# Altium PCB PcbRuler.PcbDoc
Units mil, origin at the board's own origin, x right, y up, seen from the top; angles counter-clockwise.
Board outline 6099 x 999.5 mil, 2 copper layers (Top, Bottom); 35 components, 1 nets, 1008 pads, 0 vias.
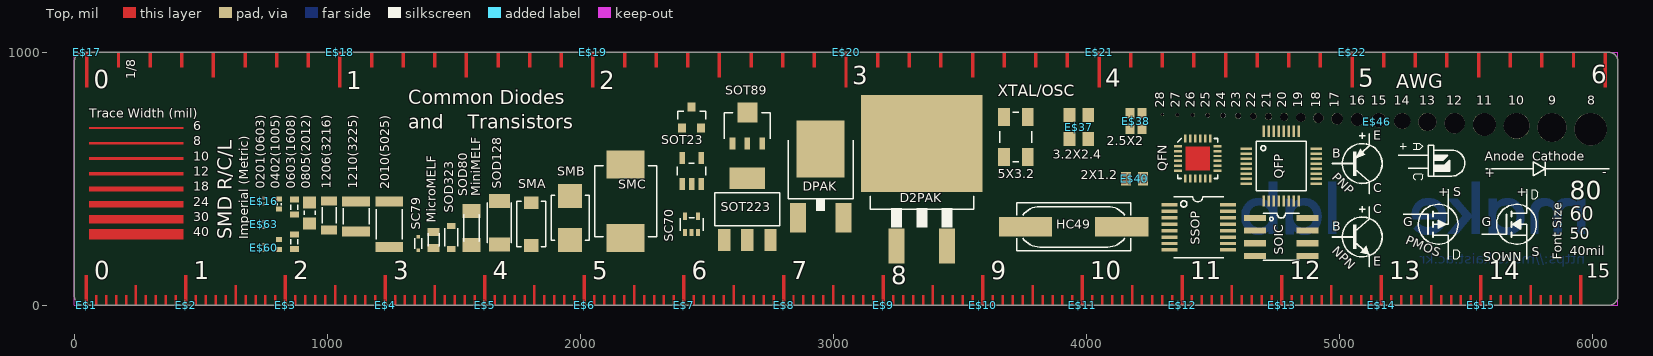
[diagram p0: Top view]
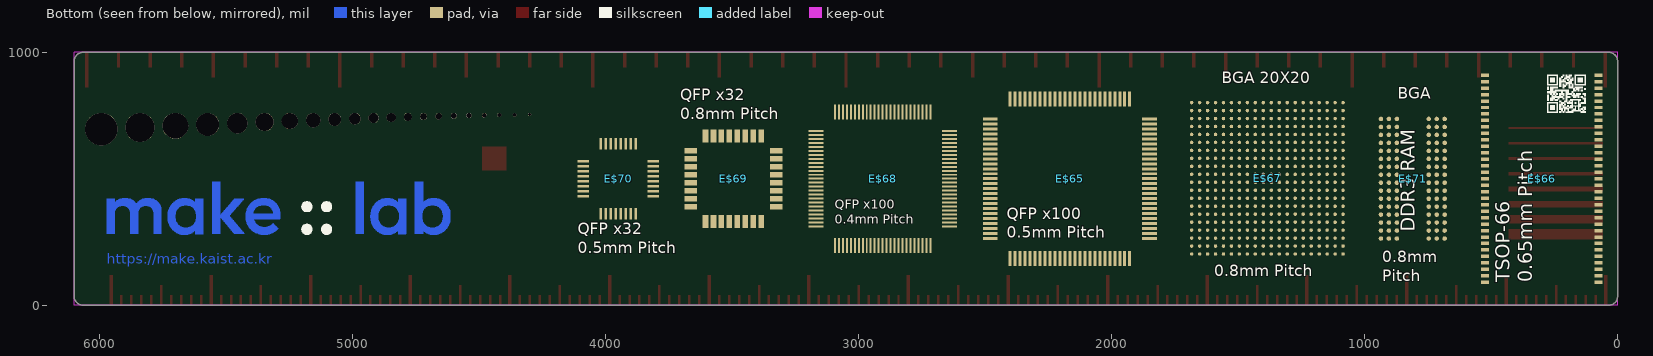
[diagram p1: Bottom view, seen from below]

## Layer stack, top to bottom
Top Solder: solder mask 0.4, Solder Resist, Dk 3.5
Top: signal copper 1.378
Dielectric 1: dielectric 12.6, FR-4, Dk 4.8
Bottom: signal copper 1.378
Bottom Solder: solder mask 0.4, Solder Resist, Dk 3.5

## Board outline
1,35 1,964.5 cw(c36,964.5) 36,999.5 6065,999.5 cw(c6065,964.5) 6100,964.5 6100,35 cw(c6065,35) 6065,0 36,0 cw(c36,35)

## Design rules (kind name [scope] priority, off if disabled: settings)
Clearance "Clearance (Same Net)" [All] p1: gap=8 ignorepadtopadclearanceinfootprint=FALSE
Clearance [All] p2: gap=8 ignorepadtopadclearanceinfootprint=FALSE except(0.1: Arc-Poly Track-Poly SMDPad-Poly THPad-Poly Via-Poly Fill-Poly Poly-Poly Poly-Region Poly-Text Poly-Hole)
HoleSize [All] p1: absolutevalues=TRUE maxlimit=100000 minlimit=15.5 maxpercent=80.000 minpercent=20.000
HoleToHoleClearance mdDrill [All] p1: gap=8 allowstackedmicrovias=TRUE
PasteMaskExpansion Expansion_SMDPaste_OFF [InPadClass('SMDPaste_OFF')] p1: expansion=0
PasteMaskExpansion mlMinCreamFrame [All] p2: expansion=0
PolygonConnect ThermalVias [IsVia] p1: connectstyle=Direct reliefconductorwidth=10 reliefentries=4 polygonreliefangle="90 Angle" airgapwidth=10
PolygonConnect [All] p2: connectstyle=Direct reliefconductorwidth=10 reliefentries=4 polygonreliefangle="90 Angle" airgapwidth=10
RoutingVias [All] p1: holewidth=15.5 width=31.5 viastyle="Through Hole" minholewidth=15.5 minwidth=31.5 maxholewidth=100 maxwidth=100
SolderMaskExpansion mlMinStopFrame [All] p1: expansion=4 istentingtop=FALSE
Width [All] p1: maxlimit=10000 minlimit=8 preferedwidth=8
27 further rules are at their usual default settings.

## Components (designator, comment, footprint, x,y, rotation, side; value= is the part's Value field where it differs from the comment)
E$1 "" EDGE-MILLIMETERS 47.24,0 r0 top
E$2 "" EDGE-MILLIMETERS 440.94,0 r0 top
E$3 "" EDGE-MILLIMETERS 834.65,0 r0 top
E$4 "" EDGE-MILLIMETERS 1228.35,0 r0 top
E$5 "" EDGE-MILLIMETERS 1622.05,0 r0 top
E$6 "" EDGE-MILLIMETERS 2015.75,0 r0 top
E$7 "" EDGE-MILLIMETERS 2409.45,0 r0 top
E$8 "" EDGE-MILLIMETERS 2803.15,0 r0 top
E$9 "" EDGE-MILLIMETERS 3196.85,0 r0 top
E$10 "" EDGE-MILLIMETERS 3590.55,0 r0 top
E$11 "" EDGE-MILLIMETERS 3984.25,0 r0 top
E$12 "" EDGE-MILLIMETERS 4377.95,0 r0 top
E$13 "" EDGE-MILLIMETERS 4771.65,0 r0 top
E$14 "" EDGE-MILLIMETERS 5165.35,0 r0 top
E$15 "" EDGE-MILLIMETERS 5559.06,0 r0 top
E$16 "" 0201 750,412 r90 top
E$17 "" EDGE-INCHES-EIGTH 50,1000 r0 top
E$18 "" EDGE-INCHES-EIGTH 1050,1000 r0 top
E$19 "" EDGE-INCHES-EIGTH 2050,1000 r0 top
E$20 "" EDGE-INCHES-EIGTH 3050,1000 r0 top
E$21 "" EDGE-INCHES-EIGTH 4050,1000 r0 top
E$22 "" EDGE-INCHES-EIGTH 5050,1000 r0 top
E$37 "" CRYSTAL-SMD-3.2X2.5 3970,704 r90 top
E$38 "" CRYSTAL-SMD-2.5X2 4196,728 r90 top
E$40 "" XTAL-2X1.2 4190,500 r0 top
E$46 "" ALL-HOLES 4300,760 r0 top
E$60 "" 0201 750,228 r90 top
E$63 "" 0201 750,320 r90 top
E$65 "" TQFP100 2165,500 r180 bottom
E$66 "" TSOP-66 300,500 r90 bottom
E$67 "" BGA-0.8MM-P-19X19 1385,501.77 r180 bottom
E$68 "" TQFP-100-12X12MM 2905,500 r180 bottom
E$69 "" TQFP32-08 3495,500 r180 bottom
E$70 "" TQFP32-5MM 3950,500 r180 bottom
E$71 "" BGA-96-14X8MM 810,500 r180 bottom

## Footprints (in the part's own frame and the unit in brackets; to place one, negate y for a bottom-side part, rotate by r counter-clockwise, add the part's x,y. Pads: shape width x height; smd on the part's side, far side on the other; paste and mask are expansions set on the pad)
0201 [mil] "0201"
  rect 11.81x11.81 smd: P$1(-11.81,0) P$2(11.81,0)
ALL-HOLES [mil] "ALL-HOLES"
  round 128.35 hole 128.35 unplated: MH1(1693.05,-64.17)
  round 114.57 hole 114.57 unplated: MH2(1540.1,-57.28)
  round 101.97 hole 101.97 unplated: MH3(1400.33,-50.98)
  round 90.55 hole 90.55 unplated: MH4(1272.58,-45.28)
  round 80.71 hole 80.71 unplated: MH5(1155.45,-40.35)
  round 72.05 hole 72.05 unplated: MH6(1047.58,-36.02)
  round 64.17 hole 64.17 unplated: MH7(947.97,-32.09)
  round 57.09 hole 57.09 unplated: MH8(855.85,-28.54)
  round 50.79 hole 50.79 unplated: MH9(770.41,-25.39)
  round 45.28 hole 45.28 unplated: MH10(690.89,-22.64)
  round 40.16 hole 40.16 unplated: MH11(616.67,-20.08)
  round 35.91 hole 35.91 unplated: MH12(547.15,-17.95)
  round 31.97 hole 31.97 unplated: MH13(481.71,-15.98)
  round 28.46 hole 28.46 unplated: MH14(420,-14.23)
  round 25.35 hole 25.35 unplated: MH15(360,-12.68)
  round 22.56 hole 22.56 unplated: MH16(300,-11.28)
  round 20.12 hole 20.12 unplated: MH17(240,-10.06)
  round 17.91 hole 17.91 unplated: MH18(180,-8.96)
  round 15.94 hole 15.94 unplated: MH19(120,-7.97)
  round 14.21 hole 14.21 unplated: MH20(60,-7.11)
  round 12.64 hole 12.64 unplated: MH21(0,-6.32)
BGA-0.8MM-P-19X19 [mm] "BGA-0.8MM-P-19X19"
  rrect100% 0.35x0.35 smd: P$1(-4.4,-4.4) P$2(-4.4,-3.6) P$3(-3.6,-3.6) P$4(-3.6,-4.4) P$5(-2.8,-4.4) P$6(-2.8,-3.6) P$7(-4.4,-2.8) P$8(-3.6,-2.8) P$9(-2.8,-2.8) P$10(-4.4,-2) P$11(-3.6,-2) P$12(-2.8,-2) P$13(-2,-2) P$14(-2,-2.8) P$15(-2,-3.6) P$16(-2,-4.4) P$17(-4.4,-1.2) P$18(-3.6,-1.2) P$19(-2.8,-1.2) P$20(-2,-1.2) P$21(-1.2,-1.2) P$22(-1.2,-2) P$23(-1.2,-2.8) P$24(-1.2,-3.6) P$25(-1.2,-4.4) P$26(-3.6,-7.6) P$27(-2.8,-7.6) P$28(-3.6,-6.8) P$29(-2.8,-6.8) P$30(-3.6,-6) P$31(-2.8,-6) P$32(-2,-6) P$33(-2,-6.8) P$34(-2,-7.6) P$35(-3.6,-5.2) P$36(-2.8,-5.2) P$37(-2,-5.2) P$38(-1.2,-5.2) P$39(-1.2,-6) P$40(-1.2,-6.8) P$41(-1.2,-7.6) P$42(-7.6,-3.6) P$43(-6.8,-3.6) P$44(-7.6,-2.8) P$45(-6.8,-2.8) P$46(-7.6,-2) P$47(-6.8,-2) P$48(-6,-2) P$49(-6,-2.8) P$50(-6,-3.6) P$51(-7.6,-1.2) P$52(-6.8,-1.2) P$53(-6,-1.2) P$54(-5.2,-1.2) P$55(-5.2,-2) P$56(-5.2,-2.8) P$57(-5.2,-3.6) P$58(-7.6,-7.6) P$59(-6.8,-7.6) P$60(-7.6,-6.8) P$61(-6.8,-6.8) P$62(-7.6,-6) P$63(-6.8,-6) P$64(-6,-6) P$65(-6,-6.8) P$66(-6,-7.6) P$67(-7.6,-5.2) P$68(-6.8,-5.2) P$69(-6,-5.2) P$70(-5.2,-5.2) P$71(-5.2,-6) P$72(-5.2,-6.8) P$73(-5.2,-7.6) P$74(-7.6,-4.4) P$75(-6.8,-4.4) P$76(-6,-4.4) P$77(-5.2,-4.4) P$78(-4.4,-5.2) P$79(-4.4,-6) P$80(-4.4,-6.8) P$81(-4.4,-7.6) P$82(2.8,-4.4) P$83(2.8,-3.6) P$84(3.6,-3.6) P$85(3.6,-4.4) P$86(4.4,-4.4) P$87(4.4,-3.6) P$88(2.8,-2.8) P$89(3.6,-2.8) P$90(4.4,-2.8) P$91(2.8,-2) P$92(3.6,-2) P$93(4.4,-2) P$94(5.2,-2) P$95(5.2,-2.8) P$96(5.2,-3.6) P$97(5.2,-4.4) P$98(2.8,-1.2) P$99(3.6,-1.2) P$100(4.4,-1.2) P$101(5.2,-1.2) P$102(6,-1.2) P$103(6,-2) P$104(6,-2.8) P$105(6,-3.6) P$106(6,-4.4) P$107(3.6,-7.6) P$108(4.4,-7.6) P$109(3.6,-6.8) P$110(4.4,-6.8) P$111(3.6,-6) P$112(4.4,-6) P$113(5.2,-6) P$114(5.2,-6.8) P$115(5.2,-7.6) P$116(3.6,-5.2) P$117(4.4,-5.2) P$118(5.2,-5.2) P$119(6,-5.2) P$120(6,-6) P$121(6,-6.8) P$122(6,-7.6) P$123(-0.4,-3.6) P$124(0.4,-3.6) P$125(-0.4,-2.8) P$126(0.4,-2.8) P$127(-0.4,-2) P$128(0.4,-2) P$129(1.2,-2) P$130(1.2,-2.8) P$131(1.2,-3.6) P$132(-0.4,-1.2) P$133(0.4,-1.2) P$134(1.2,-1.2) P$135(2,-1.2) P$136(2,-2) P$137(2,-2.8) P$138(2,-3.6) P$139(-0.4,-7.6) P$140(0.4,-7.6) P$141(-0.4,-6.8) P$142(0.4,-6.8) P$143(-0.4,-6) P$144(0.4,-6) P$145(1.2,-6) P$146(1.2,-6.8) P$147(1.2,-7.6) P$148(-0.4,-5.2) P$149(0.4,-5.2) P$150(1.2,-5.2) P$151(2,-5.2) P$152(2,-6) P$153(2,-6.8) P$154(2,-7.6) P$155(-0.4,-4.4) P$156(0.4,-4.4) P$157(1.2,-4.4) P$158(2,-4.4) P$159(2.8,-5.2) P$160(2.8,-6) P$161(2.8,-6.8) P$162(2.8,-7.6) P$163(-4.4,2.8) P$164(-4.4,3.6) P$165(-3.6,3.6) P$166(-3.6,2.8) P$167(-2.8,2.8) P$168(-2.8,3.6) P$169(-4.4,4.4) P$170(-3.6,4.4) P$171(-2.8,4.4) P$172(-4.4,5.2) P$173(-3.6,5.2) P$174(-2.8,5.2) P$175(-2,5.2) P$176(-2,4.4) P$177(-2,3.6) P$178(-2,2.8) P$179(-4.4,6) P$180(-3.6,6) P$181(-2.8,6) P$182(-2,6) P$183(-1.2,6) P$184(-1.2,5.2) P$185(-1.2,4.4) P$186(-1.2,3.6) P$187(-1.2,2.8) P$188(-3.6,-0.4) P$189(-2.8,-0.4) P$190(-3.6,0.4) P$191(-2.8,0.4) P$192(-3.6,1.2) P$193(-2.8,1.2) P$194(-2,1.2) P$195(-2,0.4) P$196(-2,-0.4) P$197(-3.6,2) P$198(-2.8,2) P$199(-2,2) P$200(-1.2,2) P$201(-1.2,1.2) P$202(-1.2,0.4) P$203(-1.2,-0.4) P$204(-7.6,3.6) P$205(-6.8,3.6) P$206(-7.6,4.4) P$207(-6.8,4.4) P$208(-7.6,5.2) P$209(-6.8,5.2) P$210(-6,5.2) P$211(-6,4.4) P$212(-6,3.6) P$213(-7.6,6) P$214(-6.8,6) P$215(-6,6) P$216(-5.2,6) P$217(-5.2,5.2) P$218(-5.2,4.4) P$219(-5.2,3.6) P$220(-7.6,-0.4) P$221(-6.8,-0.4) P$222(-7.6,0.4) P$223(-6.8,0.4) P$224(-7.6,1.2) P$225(-6.8,1.2) P$226(-6,1.2) P$227(-6,0.4) P$228(-6,-0.4) P$229(-7.6,2) P$230(-6.8,2) P$231(-6,2) P$232(-5.2,2) P$233(-5.2,1.2) P$234(-5.2,0.4) P$235(-5.2,-0.4) P$236(-7.6,2.8) P$237(-6.8,2.8) P$238(-6,2.8) P$239(-5.2,2.8) P$240(-4.4,2) P$241(-4.4,1.2) P$242(-4.4,0.4) P$243(-4.4,-0.4) P$244(2.8,2.8) P$245(2.8,3.6) P$246(3.6,3.6) P$247(3.6,2.8) P$248(4.4,2.8) P$249(4.4,3.6) P$250(2.8,4.4) P$251(3.6,4.4) P$252(4.4,4.4) P$253(2.8,5.2) P$254(3.6,5.2) P$255(4.4,5.2) P$256(5.2,5.2) P$257(5.2,4.4) P$258(5.2,3.6) P$259(5.2,2.8) P$260(2.8,6) P$261(3.6,6) P$262(4.4,6) P$263(5.2,6) P$264(6,6) P$265(6,5.2) P$266(6,4.4) P$267(6,3.6) P$268(6,2.8) P$269(3.6,-0.4) P$270(4.4,-0.4) P$271(3.6,0.4) P$272(4.4,0.4) P$273(3.6,1.2) P$274(4.4,1.2) P$275(5.2,1.2) P$276(5.2,0.4) P$277(5.2,-0.4) P$278(3.6,2) P$279(4.4,2) P$280(5.2,2) P$281(6,2) P$282(6,1.2) P$283(6,0.4) P$284(6,-0.4) P$285(-0.4,3.6) P$286(0.4,3.6) P$287(-0.4,4.4) P$288(0.4,4.4) P$289(-0.4,5.2) P$290(0.4,5.2) P$291(1.2,5.2) P$292(1.2,4.4) P$293(1.2,3.6) P$294(-0.4,6) P$295(0.4,6) P$296(1.2,6) P$297(2,6) P$298(2,5.2) P$299(2,4.4) P$300(2,3.6) P$301(-0.4,-0.4) P$302(0.4,-0.4) P$303(-0.4,0.4) P$304(0.4,0.4) P$305(-0.4,1.2) P$306(0.4,1.2) P$307(1.2,1.2) P$308(1.2,0.4) P$309(1.2,-0.4) P$310(-0.4,2) P$311(0.4,2) P$312(1.2,2) P$313(2,2) P$314(2,1.2) P$315(2,0.4) P$316(2,-0.4) P$317(-0.4,2.8) P$318(0.4,2.8) P$319(1.2,2.8) P$320(2,2.8) P$321(2.8,2) P$322(2.8,1.2) P$323(2.8,0.4) P$324(2.8,-0.4) P$325(-4.4,6.8) P$326(-3.6,6.8) P$327(-2.8,6.8) P$328(-4.4,7.6) P$329(-3.6,7.6) P$330(-2.8,7.6) P$331(-2,7.6) P$332(-2,6.8) P$338(-1.2,7.6) P$339(-1.2,6.8) P$340(-7.6,6.8) P$341(-6.8,6.8) P$342(-7.6,7.6) P$343(-6.8,7.6) P$344(-6,7.6) P$345(-6,6.8) P$350(-5.2,7.6) P$351(-5.2,6.8) P$352(2.8,6.8) P$353(3.6,6.8) P$354(4.4,6.8) P$355(2.8,7.6) P$356(3.6,7.6) P$357(4.4,7.6) P$358(5.2,7.6) P$359(5.2,6.8) P$365(6,7.6) P$366(6,6.8) P$367(-0.4,6.8) P$368(0.4,6.8) P$369(-0.4,7.6) P$370(0.4,7.6) P$371(1.2,7.6) P$372(1.2,6.8) P$377(2,7.6) P$378(2,6.8) P$379(6.8,-4.4) P$380(6.8,-3.6) P$381(6.8,-2.8) P$382(6.8,-2) P$383(7.6,-2) P$384(7.6,-2.8) P$385(7.6,-3.6) P$386(7.6,-4.4) P$387(6.8,-1.2) P$388(7.6,-1.2) P$394(6.8,-7.6) P$395(6.8,-6.8) P$396(6.8,-6) P$397(7.6,-6) P$398(7.6,-6.8) P$399(7.6,-7.6) P$400(6.8,-5.2) P$401(7.6,-5.2) P$406(6.8,2.8) P$407(6.8,3.6) P$408(6.8,4.4) P$409(6.8,5.2) P$410(7.6,5.2) P$411(7.6,4.4) P$412(7.6,3.6) P$413(7.6,2.8) P$414(6.8,6) P$415(7.6,6) P$421(6.8,-0.4) P$422(6.8,0.4) P$423(6.8,1.2) P$424(7.6,1.2) P$425(7.6,0.4) P$426(7.6,-0.4) P$427(6.8,2) P$428(7.6,2) P$433(6.8,6.8) P$434(6.8,7.6) P$435(7.6,7.6) P$436(7.6,6.8)
BGA-96-14X8MM [mm] "BGA-96-14X8MM"
  rrect100% 0.45x0.45 smd: P$1(1.6,6) P$2(2.4,6) P$3(3.2,6) P$4(1.6,5.2) P$5(2.4,5.2) P$6(3.2,5.2) P$7(1.6,4.4) P$8(2.4,4.4) P$9(3.2,4.4) P$10(1.6,3.6) P$11(2.4,3.6) P$12(3.2,3.6) P$13(1.6,2.8) P$14(2.4,2.8) P$15(3.2,2.8) P$16(1.6,2) P$17(2.4,2) P$18(3.2,2) P$19(1.6,1.2) P$20(2.4,1.2) P$21(3.2,1.2) P$22(1.6,0.4) P$23(2.4,0.4) P$24(3.2,0.4) P$25(1.6,-0.4) P$26(2.4,-0.4) P$27(3.2,-0.4) P$28(1.6,-1.2) P$29(2.4,-1.2) P$30(3.2,-1.2) P$31(1.6,-2) P$32(2.4,-2) P$33(3.2,-2) P$34(1.6,-2.8) P$35(2.4,-2.8) P$36(3.2,-2.8) P$37(1.6,-3.6) P$38(2.4,-3.6) P$39(3.2,-3.6) P$40(1.6,-4.4) P$41(2.4,-4.4) P$42(3.2,-4.4) P$43(1.6,-5.2) P$44(2.4,-5.2) P$45(3.2,-5.2) P$46(1.6,-6) P$47(2.4,-6) P$48(3.2,-6) P$49(-3.2,6) P$50(-2.4,6) P$51(-1.6,6) P$52(-3.2,5.2) P$53(-2.4,5.2) P$54(-1.6,5.2) P$55(-3.2,4.4) P$56(-2.4,4.4) P$57(-1.6,4.4) P$58(-3.2,3.6) P$59(-2.4,3.6) P$60(-1.6,3.6) P$61(-3.2,2.8) P$62(-2.4,2.8) P$63(-1.6,2.8) P$64(-3.2,2) P$65(-2.4,2) P$66(-1.6,2) P$67(-3.2,1.2) P$68(-2.4,1.2) P$69(-1.6,1.2) P$70(-3.2,0.4) P$71(-2.4,0.4) P$72(-1.6,0.4) P$73(-3.2,-0.4) P$74(-2.4,-0.4) P$75(-1.6,-0.4) P$76(-3.2,-1.2) P$77(-2.4,-1.2) P$78(-1.6,-1.2) P$79(-3.2,-2) P$80(-2.4,-2) P$81(-1.6,-2) P$82(-3.2,-2.8) P$83(-2.4,-2.8) P$84(-1.6,-2.8) P$85(-3.2,-3.6) P$86(-2.4,-3.6) P$87(-1.6,-3.6) P$88(-3.2,-4.4) P$89(-2.4,-4.4) P$90(-1.6,-4.4) P$91(-3.2,-5.2) P$92(-2.4,-5.2) P$93(-1.6,-5.2) P$94(-3.2,-6) P$95(-2.4,-6) P$96(-1.6,-6)
CRYSTAL-SMD-2.5X2 [mm] "CRYSTAL-SMD-2.5X2"
  rect 1.05x0.9 smd: 1(-0.795,-0.6) 2(0.795,-0.6) 3(0.795,0.6) 4(-0.795,0.6)
CRYSTAL-SMD-3.2X2.5 [mil] "CRYSTAL-SMD-3.2X2.5"
  rect 55.12x47.24 smd: 1(-47.24,-37.4) 2(47.24,-37.4) 3(47.24,37.4) 4(-47.24,37.4)
EDGE-INCHES-EIGTH [mil] "EDGE-INCHES-EIGTH"
  Top region: -5.91,-137.8 -5.91,0 5.91,0 5.91,-137.8
  Top region: 119.09,-59.06 119.09,0 130.91,0 130.91,-59.06
  Top region: 244.09,-59.06 244.09,0 255.91,0 255.91,-59.06
  Top region: 369.09,-59.06 369.09,0 380.91,0 380.91,-59.06
  Top region: 494.09,-98.43 494.09,0 505.91,0 505.91,-98.43
  Top region: 619.09,-59.06 619.09,0 630.91,0 630.91,-59.06
  Top region: 744.09,-59.06 744.09,0 755.91,0 755.91,-59.06
  Top region: 869.09,-59.06 869.09,0 880.91,0 880.91,-59.06
  Top region: 994.09,-137.8 994.09,0 1005.91,0 1005.91,-137.8
EDGE-MILLIMETERS [mil] "EDGE-MILLIMETERS"
  Top region: -5.91,0 -5.91,118.11 5.91,118.11 5.91,0
  Top region: 35.43,0 35.43,39.37 43.31,39.37 43.31,0
  Top region: 74.8,0 74.8,39.37 82.68,39.37 82.68,0
  Top region: 114.17,0 114.17,39.37 122.05,39.37 122.05,0
  Top region: 192.91,0 192.91,78.74 200.79,78.74 200.79,0
  Top region: 153.54,0 153.54,39.37 161.42,39.37 161.42,0
  Top region: 232.28,0 232.28,39.37 240.16,39.37 240.16,0
  Top region: 271.65,0 271.65,39.37 279.53,39.37 279.53,0
  Top region: 311.02,0 311.02,39.37 318.9,39.37 318.9,0
  Top region: 350.39,0 350.39,39.37 358.27,39.37 358.27,0
  Top region: 387.8,0 387.8,118.11 399.61,118.11 399.61,0
TQFP32-5MM [mil] "TQFP32-5MM"
  rect 45x10 smd: 1(-137.8,68.9) 2(-137.8,49.21) 3(-137.8,29.53) 4(-137.8,9.84) 5(-137.8,-9.84) 6(-137.8,-29.53) 7(-137.8,-49.21) 8(-137.8,-68.9) 17(137.8,-68.9) 18(137.8,-49.21) 19(137.8,-29.53) 20(137.8,-9.84) 21(137.8,9.84) 22(137.8,29.53) 23(137.8,49.21) 24(137.8,68.9)
  rect 10x45 smd: 9(-68.9,-137.8) 10(-49.21,-137.8) 11(-29.53,-137.8) 12(-9.84,-137.8) 13(9.84,-137.8) 14(29.53,-137.8) 15(49.21,-137.8) 16(68.9,-137.8) 25(68.9,137.8) 26(49.21,137.8) 27(29.53,137.8) 28(9.84,137.8) 29(-9.84,137.8) 30(-29.53,137.8) 31(-49.21,137.8) 32(-68.9,137.8)
TQFP32-08 [mil] "TQFP32-08"
  rect 50x22 smd: 1(-169,110.24) 2(-169,78.74) 3(-169,47.24) 4(-169,15.75) 5(-169,-15.75) 6(-169,-47.24) 7(-169,-78.74) 8(-169,-110.24) 17(169,-110.24) 18(169,-78.74) 19(169,-47.24) 20(169,-15.75) 21(169,15.75) 22(169,47.24) 23(169,78.74) 24(169,110.24)
  rect 22x50 smd: 9(-110.24,-169) 10(-78.74,-169) 11(-47.24,-169) 12(-15.75,-169) 13(15.75,-169) 14(47.24,-169) 15(78.74,-169) 16(110.24,-169) 25(110.24,169) 26(78.74,169) 27(47.24,169) 28(15.75,169) 29(-15.75,169) 30(-47.24,169) 31(-78.74,169) 32(-110.24,169)
TQFP100 [mm] "TQFP100"
  rect 1.5x0.3 smd: 1(-8,6) 2(-8,5.5) 3(-8,5) 4(-8,4.5) 5(-8,4) 6(-8,3.5) 7(-8,3) 8(-8,2.5) 9(-8,2) 10(-8,1.5) 11(-8,1) 12(-8,0.5) 13(-8,0) 14(-8,-0.5) 15(-8,-1) 16(-8,-1.5) 17(-8,-2) 18(-8,-2.5) 19(-8,-3) 20(-8,-3.5) 21(-8,-4) 22(-8,-4.5) 23(-8,-5) 24(-8,-5.5) 25(-8,-6) 51(8,-6) 52(8,-5.5) 53(8,-5) 54(8,-4.5) 55(8,-4) 56(8,-3.5) 57(8,-3) 58(8,-2.5) 59(8,-2) 60(8,-1.5) 61(8,-1) 62(8,-0.5) 63(8,0) 64(8,0.5) 65(8,1) 66(8,1.5) 67(8,2) 68(8,2.5) 69(8,3) 70(8,3.5) 71(8,4) 72(8,4.5) 73(8,5) 74(8,5.5) 75(8,6)
  rect 0.3x1.5 smd: 26(-6,-8) 27(-5.5,-8) 28(-5,-8) 29(-4.5,-8) 30(-4,-8) 31(-3.5,-8) 32(-3,-8) 33(-2.5,-8) 34(-2,-8) 35(-1.5,-8) 36(-1,-8) 37(-0.5,-8) 38(0,-8) 39(0.5,-8) 40(1,-8) 41(1.5,-8) 42(2,-8) 43(2.5,-8) 44(3,-8) 45(3.5,-8) 46(4,-8) 47(4.5,-8) 48(5,-8) 49(5.5,-8) 50(6,-8) 76(6,8) 77(5.5,8) 78(5,8) 79(4.5,8) 80(4,8) 81(3.5,8) 82(3,8) 83(2.5,8) 84(2,8) 85(1.5,8) 86(1,8) 87(0.5,8) 88(0,8) 89(-0.5,8) 90(-1,8) 91(-1.5,8) 92(-2,8) 93(-2.5,8) 94(-3,8) 95(-3.5,8) 96(-4,8) 97(-4.5,8) 98(-5,8) 99(-5.5,8) 100(-6,8)
TQFP-100-12X12MM [mm] "TQFP-100-12X12MM"
  rect 1.5x0.2 smd: 1(-6.7,4.8) 2(-6.7,4.4) 3(-6.7,4) 4(-6.7,3.6) 5(-6.7,3.2) 6(-6.7,2.8) 7(-6.7,2.4) 8(-6.7,2) 9(-6.7,1.6) 10(-6.7,1.2) 11(-6.7,0.8) 12(-6.7,0.4) 13(-6.7,0) 14(-6.7,-0.4) 15(-6.7,-0.8) 16(-6.7,-1.2) 17(-6.7,-1.6) 18(-6.7,-2) 19(-6.7,-2.4) 20(-6.7,-2.8) 21(-6.7,-3.2) 22(-6.7,-3.6) 23(-6.7,-4) 24(-6.7,-4.4) 25(-6.7,-4.8) 51(6.7,-4.8) 52(6.7,-4.4) 53(6.7,-4) 54(6.7,-3.6) 55(6.7,-3.2) 56(6.7,-2.8) 57(6.7,-2.4) 58(6.7,-2) 59(6.7,-1.6) 60(6.7,-1.2) 61(6.7,-0.8) 62(6.7,-0.4) 63(6.7,0) 64(6.7,0.4) 65(6.7,0.8) 66(6.7,1.2) 67(6.7,1.6) 68(6.7,2) 69(6.7,2.4) 70(6.7,2.8) 71(6.7,3.2) 72(6.7,3.6) 73(6.7,4) 74(6.7,4.4) 75(6.7,4.8)
  rect 0.2x1.5 smd: 26(-4.8,-6.7) 27(-4.4,-6.7) 28(-4,-6.7) 29(-3.6,-6.7) 30(-3.2,-6.7) 31(-2.8,-6.7) 32(-2.4,-6.7) 33(-2,-6.7) 34(-1.6,-6.7) 35(-1.2,-6.7) 36(-0.8,-6.7) 37(-0.4,-6.7) 38(0,-6.7) 39(0.4,-6.7) 40(0.8,-6.7) 41(1.2,-6.7) 42(1.6,-6.7) 43(2,-6.7) 44(2.4,-6.7) 45(2.8,-6.7) 46(3.2,-6.7) 47(3.6,-6.7) 48(4,-6.7) 49(4.4,-6.7) 50(4.8,-6.7) 76(4.8,6.7) 77(4.4,6.7) 78(4,6.7) 79(3.6,6.7) 80(3.2,6.7) 81(2.8,6.7) 82(2.4,6.7) 83(2,6.7) 84(1.6,6.7) 85(1.2,6.7) 86(0.8,6.7) 87(0.4,6.7) 88(0,6.7) 89(-0.4,6.7) 90(-0.8,6.7) 91(-1.2,6.7) 92(-1.6,6.7) 93(-2,6.7) 94(-2.4,6.7) 95(-2.8,6.7) 96(-3.2,6.7) 97(-3.6,6.7) 98(-4,6.7) 99(-4.4,6.7) 100(-4.8,6.7)
TSOP-66 [mm] "TSOP-66"
  rect 0.35x0.8 smd: P$1(-10.4,-5.7) P$2(-9.75,-5.7) P$3(-9.1,-5.7) P$4(-8.45,-5.7) P$5(-7.8,-5.7) P$6(-7.15,-5.7) P$7(-6.5,-5.7) P$8(-5.85,-5.7) P$9(-5.2,-5.7) P$10(-4.55,-5.7) P$11(-3.9,-5.7) P$12(-3.25,-5.7) P$13(-2.6,-5.7) P$14(-1.95,-5.7) P$15(-1.3,-5.7) P$16(-0.65,-5.7) P$17(0,-5.7) P$18(0.65,-5.7) P$19(1.3,-5.7) P$20(1.95,-5.7) P$21(2.6,-5.7) P$22(3.25,-5.7) P$23(3.9,-5.7) P$24(4.55,-5.7) P$25(5.2,-5.7) P$26(5.85,-5.7) P$27(6.5,-5.7) P$28(7.15,-5.7) P$29(7.8,-5.7) P$30(8.45,-5.7) P$31(9.1,-5.7) P$32(9.75,-5.7) P$33(10.4,-5.7) P$34(10.4,5.7) P$35(9.75,5.7) P$36(9.1,5.7) P$37(8.45,5.7) P$38(7.8,5.7) P$39(7.15,5.7) P$40(6.5,5.7) P$41(5.85,5.7) P$42(5.2,5.7) P$43(4.55,5.7) P$44(3.9,5.7) P$45(3.25,5.7) P$46(2.6,5.7) P$47(1.95,5.7) P$48(1.3,5.7) P$49(0.65,5.7) P$50(0,5.7) P$51(-0.65,5.7) P$52(-1.3,5.7) P$53(-1.95,5.7) P$54(-2.6,5.7) P$55(-3.25,5.7) P$56(-3.9,5.7) P$57(-4.55,5.7) P$58(-5.2,5.7) P$59(-5.85,5.7) P$60(-6.5,5.7) P$61(-7.15,5.7) P$62(-7.8,5.7) P$63(-8.45,5.7) P$64(-9.1,5.7) P$65(-9.75,5.7) P$66(-10.4,5.7)
XTAL-2X1.2 [mm] "XTAL-2X1.2"
  rect 1x1.4 smd: P$1(-0.85,0) P$2(0.85,0)

## Part data
E$1 E$2 E$3 E$4 E$5 E$6 E$7 E$8 E$9 E$10 E$11 E$12 E$13 E$14 E$15: library part EDGE-MILLIMETERS, PackageName=EDGE-MILLIMETERS
E$16 E$60 E$63: library part 0201, PackageName=0201
E$17 E$18 E$19 E$20 E$21 E$22: library part EDGE-INCHES-EIGTH, PackageName=EDGE-INCHES-EIGTH
E$37: library part CRYSTAL-SMD-3.2X2.5, PackageName=CRYSTAL-SMD-3.2X2.5
E$38: library part CRYSTAL-SMD-2.5X2, PackageName=CRYSTAL-SMD-2.5X2
E$40: library part XTAL-2X1.2, PackageName=XTAL-2X1.2
E$46: library part ALL-HOLES, PackageName=ALL-HOLES
E$65: library part TQFP100, PackageName=TQFP100
E$66: library part TSOP-66, PackageName=TSOP-66
E$67: library part BGA-0.8MM-P-19X19, PackageName=BGA-0.8MM-P-19X19
E$68: library part TQFP-100-12X12MM, PackageName=TQFP-100-12X12MM
E$69: library part TQFP32-08, PackageName=TQFP32-08
E$70: library part TQFP32-5MM, PackageName=TQFP32-5MM
E$71: library part BGA-96-14X8MM, PackageName=BGA-96-14X8MM

## Free pads (board coordinates)
  rect 23.62x19.69 smd: 1(810,220.31) 1(810,380.31) 2(810,259.69) 2(810,419.69)
  rect 35.43x23.62 smd: 1(870,221.47) 1(870,358.47) 2(870,280.53) 2(870,417.53)
  rect 51.18x47.24 smd: 1(930,323.66) 2(930,406.34)
  rect 62.99x35.43 smd: 1(1007,297.91) 2(1007,412.09)
  rect 110.24x39.37 smd: 1(1114,410.06) 2(1114,291.94) P$1(1245,229.45) P$2(1245,410.55)
  rect 32.68x24.8 smd: 1(1490,313.28) 2(1490,222.72)
  rect 21.65x47.24 smd: 1(2402.6,478.81) 2(2440,478.81) 3(2477.4,478.81) 4(2477.4,581.19) 5(2402.6,581.19)
  rect 31.5x35.43 smd: 1(2402.6,700.63) 2(2477.4,700.63) 3(2440,783.31)
  rect 15.75x29.53 smd paste+0: 1(2414.41,287.52) 2(2440,287.52) 3(2465.59,287.52) 4(2465.59,352.48) 5(2414.41,352.48)
  rect 48x88 smd: 1(2569,258) 2(2660,258) 3(2751,258)
  rect 22.83x47.24 smd: 1(2600.94,639.13) 2(2660,639.13) 3(2719.06,639.13)
  rect 62.99x118.11 smd: 1(2860.24,345.94) 3(3039.76,345.94)
  rect 62.99x137.8 smd: 1(3250,234.21) 3(3450,234.21)
  rect 210x76 smd: 1(3760,310) 2(4140,310)
  rect 47.24x70.87 smd: 1(3768.24,586.26) 2(3768.24,743.74) 3(3673.76,743.74) 4(3673.76,586.26)
  rect 62.99x13.78 smd: 1(4327.8,397.6) 2(4327.8,372.01) 3(4327.8,346.42) 4(4327.8,320.83) 5(4327.8,295.24) 6(4327.8,269.65) 7(4327.8,244.06) 8(4327.8,218.46) 9(4560.08,218.46) 10(4560.08,244.06) 11(4560.08,269.65) 12(4560.08,295.24) 13(4560.08,320.83) 14(4560.08,346.42) 15(4560.08,372.01) 16(4560.08,397.6)
  rect 31.5x9.84 smd: 1(4361.26,629.21) 2(4361.26,609.53) 3(4361.26,589.84) 4(4361.26,570.16) 5(4361.26,550.47) 6(4361.26,530.79) 13(4518.74,530.79) 14(4518.74,550.47) 15(4518.74,570.16) 16(4518.74,589.84) 17(4518.74,609.53) 18(4518.74,629.21)
  rect 45x10 smd: 1(4632.2,618.9) 2(4632.2,599.21) 3(4632.2,579.53) 4(4632.2,559.84) 5(4632.2,540.16) 6(4632.2,520.47) 7(4632.2,500.79) 8(4632.2,481.1) 17(4907.8,481.1) 18(4907.8,500.79) 19(4907.8,520.47) 20(4907.8,540.16) 21(4907.8,559.84) 22(4907.8,579.53) 23(4907.8,599.21) 24(4907.8,618.9)
  rect 87x24 smd: 1(4667,345) 2(4667,295) 3(4667,245) 4(4667,195) 5(4873,195) 6(4873,245) 7(4873,295) 8(4873,345)
  rect 141.73x86.61 smd: 4(2660,502.01)
  rect 78.74x78.74 smd: 4(2660,761.18)
  rect 190x225 smd: 4(2950,617.52)
  rect 9.84x31.5 smd: 7(4390.79,501.26) 8(4410.47,501.26) 9(4430.16,501.26) 10(4449.84,501.26) 11(4469.53,501.26) 12(4489.21,501.26) 19(4489.21,658.74) 20(4469.53,658.74) 21(4449.84,658.74) 22(4430.16,658.74) 23(4410.47,658.74) 24(4390.79,658.74)
  rect 10x45 smd: 9(4701.1,412.2) 10(4720.79,412.2) 11(4740.47,412.2) 12(4760.16,412.2) 13(4779.84,412.2) 14(4799.53,412.2) 15(4819.21,412.2) 16(4838.9,412.2) 25(4838.9,687.8) 26(4819.21,687.8) 27(4799.53,687.8) 28(4779.84,687.8) 29(4760.16,687.8) 30(4740.47,687.8) 31(4720.79,687.8) 32(4701.1,687.8)
  rect 13.78x13.78 smd: A(1360,270.57) C(1360,217.43)
  rect 47.24x31.5 smd: A(1420,289.5) C(1420,226.5)
  rect 70.87x55.12 smd: A(1570,371.93) C(1570,238.07)
  rect 82.68x55.12 smd: A(1680,412.61) C(1680,239.39)
  rect 57.87x50 smd: A(1806,405.65) C(1806,236.35)
  rect 94.49x94.49 smd: A(1960,431.61) C(1960,258.39)
  rect 149.61x110.24 smd: A(2179,556.67) C(2179,265.33)
  rect 480.32x383.86 smd: TAB(3350,638.74)

## Nets (pads, with @x,y where several pads share a name; then routed paths per layer and width w, separated by ;. In a path a pad name is that pad's centre, name@x,y a point inside that pad or via, vN(x,y) a via of type N, cw(c..) or ccw(c..) an arc to the next point about the centre after c; other vN are vias at no path point)
S$1: 
pads on no net: E$16.P$1 E$16.P$2 E$37.1 E$37.2 E$37.3 E$37.4 E$38.1 E$38.2 E$38.3 E$38.4 E$40.P$1 E$40.P$2 E$46.MH1 E$46.MH2 E$46.MH3 E$46.MH4 E$46.MH5 E$46.MH6 E$46.MH7 E$46.MH8 E$46.MH9 E$46.MH10 E$46.MH11 E$46.MH12 E$46.MH13 E$46.MH14 E$46.MH15 E$46.MH16 E$46.MH17 E$46.MH18 E$46.MH19 E$46.MH20 E$46.MH21 E$60.P$1 E$60.P$2 E$63.P$1 E$63.P$2 E$65.1 E$65.2 E$65.3 E$65.4 E$65.5 E$65.6 E$65.7 E$65.8 E$65.9 E$65.10 E$65.11 E$65.12 E$65.13 E$65.14 E$65.15 E$65.16 E$65.17 E$65.18 E$65.19 E$65.20 E$65.21 E$65.22 E$65.23 E$65.24 E$65.25 E$65.26 E$65.27 E$65.28 E$65.29 E$65.30 E$65.31 E$65.32 E$65.33 E$65.34 E$65.35 E$65.36 E$65.37 E$65.38 E$65.39 E$65.40 E$65.41 E$65.42 E$65.43 E$65.44 E$65.45 E$65.46 E$65.47 E$65.48 E$65.49 E$65.50 E$65.51 E$65.52 E$65.53 E$65.54 E$65.55 E$65.56 E$65.57 E$65.58 E$65.59 E$65.60 E$65.61 E$65.62 E$65.63 E$65.64 E$65.65 E$65.66 E$65.67 E$65.68 E$65.69 E$65.70 E$65.71 E$65.72 E$65.73 E$65.74 E$65.75 E$65.76 E$65.77 E$65.78 E$65.79 E$65.80 E$65.81 E$65.82 E$65.83 E$65.84 E$65.85 E$65.86 E$65.87 E$65.88 E$65.89 E$65.90 E$65.91 E$65.92 E$65.93 E$65.94 E$65.95 E$65.96 E$65.97 E$65.98 E$65.99 E$65.100 E$66.P$1 E$66.P$2 E$66.P$3 E$66.P$4 E$66.P$5 E$66.P$6 E$66.P$7 E$66.P$8 E$66.P$9 E$66.P$10 E$66.P$11 E$66.P$12 E$66.P$13 E$66.P$14 E$66.P$15 E$66.P$16 E$66.P$17 E$66.P$18 E$66.P$19 E$66.P$20 E$66.P$21 E$66.P$22 E$66.P$23 E$66.P$24 E$66.P$25 E$66.P$26 E$66.P$27 E$66.P$28 E$66.P$29 E$66.P$30 E$66.P$31 E$66.P$32 E$66.P$33 E$66.P$34 E$66.P$35 E$66.P$36 E$66.P$37 E$66.P$38 E$66.P$39 E$66.P$40 E$66.P$41 E$66.P$42 E$66.P$43 E$66.P$44 E$66.P$45 E$66.P$46 E$66.P$47 E$66.P$48 E$66.P$49 E$66.P$50 E$66.P$51 E$66.P$52 E$66.P$53 E$66.P$54 E$66.P$55 E$66.P$56 E$66.P$57 E$66.P$58 E$66.P$59 E$66.P$60 E$66.P$61 E$66.P$62 E$66.P$63 E$66.P$64 E$66.P$65 E$66.P$66 E$67.P$1 E$67.P$2 E$67.P$3 E$67.P$4 E$67.P$5 E$67.P$6 E$67.P$7 E$67.P$8 E$67.P$9 E$67.P$10 E$67.P$11 E$67.P$12 E$67.P$13 E$67.P$14 E$67.P$15 E$67.P$16 E$67.P$17 E$67.P$18 E$67.P$19 E$67.P$20 E$67.P$21 E$67.P$22 E$67.P$23 E$67.P$24 E$67.P$25 E$67.P$26 E$67.P$27 E$67.P$28 E$67.P$29 E$67.P$30 E$67.P$31 E$67.P$32 E$67.P$33 E$67.P$34 E$67.P$35 E$67.P$36 E$67.P$37 E$67.P$38 E$67.P$39 E$67.P$40 E$67.P$41 E$67.P$42 E$67.P$43 E$67.P$44 E$67.P$45 E$67.P$46 E$67.P$47 E$67.P$48 E$67.P$49 E$67.P$50 E$67.P$51 E$67.P$52 E$67.P$53 E$67.P$54 E$67.P$55 E$67.P$56 E$67.P$57 E$67.P$58 E$67.P$59 E$67.P$60 E$67.P$61 E$67.P$62 E$67.P$63 E$67.P$64 E$67.P$65 E$67.P$66 E$67.P$67 E$67.P$68 E$67.P$69 E$67.P$70 E$67.P$71 E$67.P$72 E$67.P$73 E$67.P$74 E$67.P$75 E$67.P$76 E$67.P$77 E$67.P$78 E$67.P$79 E$67.P$80 E$67.P$81 E$67.P$82 E$67.P$83 E$67.P$84 E$67.P$85 E$67.P$86 E$67.P$87 E$67.P$88 E$67.P$89 E$67.P$90 E$67.P$91 E$67.P$92 E$67.P$93 E$67.P$94 E$67.P$95 E$67.P$96 E$67.P$97 E$67.P$98 E$67.P$99 E$67.P$100 E$67.P$101 E$67.P$102 E$67.P$103 E$67.P$104 E$67.P$105 E$67.P$106 E$67.P$107 E$67.P$108 E$67.P$109 E$67.P$110 E$67.P$111 E$67.P$112 E$67.P$113 E$67.P$114 E$67.P$115 E$67.P$116 E$67.P$117 E$67.P$118 E$67.P$119 E$67.P$120 E$67.P$121 E$67.P$122 E$67.P$123 E$67.P$124 E$67.P$125 E$67.P$126 E$67.P$127 E$67.P$128 E$67.P$129 E$67.P$130 E$67.P$131 E$67.P$132 E$67.P$133 E$67.P$134 E$67.P$135 E$67.P$136 E$67.P$137 E$67.P$138 E$67.P$139 E$67.P$140 E$67.P$141 E$67.P$142 E$67.P$143 E$67.P$144 E$67.P$145 E$67.P$146 E$67.P$147 E$67.P$148 E$67.P$149 E$67.P$150 E$67.P$151 E$67.P$152 E$67.P$153 E$67.P$154 E$67.P$155 E$67.P$156 E$67.P$157 E$67.P$158 E$67.P$159 E$67.P$160 E$67.P$161 E$67.P$162 E$67.P$163 E$67.P$164 E$67.P$165 E$67.P$166 E$67.P$167 E$67.P$168 E$67.P$169 E$67.P$170 E$67.P$171 E$67.P$172 E$67.P$173 E$67.P$174 E$67.P$175 E$67.P$176 E$67.P$177 E$67.P$178 E$67.P$179 E$67.P$180 E$67.P$181 E$67.P$182 E$67.P$183 E$67.P$184 E$67.P$185 E$67.P$186 E$67.P$187 E$67.P$188 E$67.P$189 E$67.P$190 E$67.P$191 E$67.P$192 E$67.P$193 E$67.P$194 E$67.P$195 E$67.P$196 E$67.P$197 E$67.P$198 E$67.P$199 E$67.P$200 E$67.P$201 E$67.P$202 E$67.P$203 E$67.P$204 E$67.P$205 E$67.P$206 E$67.P$207 E$67.P$208 E$67.P$209 E$67.P$210 E$67.P$211 E$67.P$212 E$67.P$213 E$67.P$214 E$67.P$215 E$67.P$216 E$67.P$217 E$67.P$218 E$67.P$219 E$67.P$220 E$67.P$221 E$67.P$222 E$67.P$223 E$67.P$224 E$67.P$225 E$67.P$226 E$67.P$227 E$67.P$228 E$67.P$229 E$67.P$230 E$67.P$231 E$67.P$232 E$67.P$233 E$67.P$234 E$67.P$235 E$67.P$236 E$67.P$237 E$67.P$238 E$67.P$239 E$67.P$240 E$67.P$241 E$67.P$242 E$67.P$243 E$67.P$244 E$67.P$245 E$67.P$246 E$67.P$247 E$67.P$248 E$67.P$249 E$67.P$250 E$67.P$251 E$67.P$252 E$67.P$253 E$67.P$254 E$67.P$255 E$67.P$256 E$67.P$257 E$67.P$258 E$67.P$259 E$67.P$260 E$67.P$261 E$67.P$262 E$67.P$263 E$67.P$264 E$67.P$265 E$67.P$266 E$67.P$267 E$67.P$268 E$67.P$269 E$67.P$270 E$67.P$271 E$67.P$272 E$67.P$273 E$67.P$274 E$67.P$275 E$67.P$276 E$67.P$277 E$67.P$278 E$67.P$279 E$67.P$280 E$67.P$281 E$67.P$282 E$67.P$283 E$67.P$284 E$67.P$285 E$67.P$286 E$67.P$287 E$67.P$288 E$67.P$289 E$67.P$290 E$67.P$291 E$67.P$292 E$67.P$293 E$67.P$294 E$67.P$295 E$67.P$296 E$67.P$297 E$67.P$298 E$67.P$299 E$67.P$300 E$67.P$301 E$67.P$302 E$67.P$303 E$67.P$304 E$67.P$305 E$67.P$306 E$67.P$307 E$67.P$308 E$67.P$309 E$67.P$310 E$67.P$311 E$67.P$312 E$67.P$313 E$67.P$314 E$67.P$315 E$67.P$316 E$67.P$317 E$67.P$318 E$67.P$319 E$67.P$320 E$67.P$321 E$67.P$322 E$67.P$323 E$67.P$324 E$67.P$325 E$67.P$326 E$67.P$327 E$67.P$328 E$67.P$329 E$67.P$330 E$67.P$331 E$67.P$332 E$67.P$338 E$67.P$339 E$67.P$340 E$67.P$341 E$67.P$342 E$67.P$343 E$67.P$344 E$67.P$345 E$67.P$350 E$67.P$351 E$67.P$352 E$67.P$353 E$67.P$354 E$67.P$355 E$67.P$356 E$67.P$357 E$67.P$358 E$67.P$359 E$67.P$365 E$67.P$366 E$67.P$367 E$67.P$368 E$67.P$369 E$67.P$370 E$67.P$371 E$67.P$372 E$67.P$377 E$67.P$378 E$67.P$379 E$67.P$380 E$67.P$381 E$67.P$382 E$67.P$383 E$67.P$384 E$67.P$385 E$67.P$386 E$67.P$387 E$67.P$388 E$67.P$394 E$67.P$395 E$67.P$396 E$67.P$397 E$67.P$398 E$67.P$399 E$67.P$400 E$67.P$401 E$67.P$406 E$67.P$407 E$67.P$408 E$67.P$409 E$67.P$410 E$67.P$411 E$67.P$412 E$67.P$413 E$67.P$414 E$67.P$415 E$67.P$421 E$67.P$422 E$67.P$423 E$67.P$424 E$67.P$425 E$67.P$426 E$67.P$427 E$67.P$428 E$67.P$433 E$67.P$434 E$67.P$435 E$67.P$436 E$68.1 E$68.2 E$68.3 E$68.4 E$68.5 E$68.6 E$68.7 E$68.8 E$68.9 E$68.10 E$68.11 E$68.12 E$68.13 E$68.14 E$68.15 E$68.16 E$68.17 E$68.18 E$68.19 E$68.20 E$68.21 E$68.22 E$68.23 E$68.24 E$68.25 E$68.26 E$68.27 E$68.28 E$68.29 E$68.30 E$68.31 E$68.32 E$68.33 E$68.34 E$68.35 E$68.36 E$68.37 E$68.38 E$68.39 E$68.40 E$68.41 E$68.42 E$68.43 E$68.44 E$68.45 E$68.46 E$68.47 E$68.48 E$68.49 E$68.50 E$68.51 E$68.52 E$68.53 E$68.54 E$68.55 E$68.56 E$68.57 E$68.58 E$68.59 E$68.60 E$68.61 E$68.62 E$68.63 E$68.64 E$68.65 E$68.66 E$68.67 E$68.68 E$68.69 E$68.70 E$68.71 E$68.72 E$68.73 E$68.74 E$68.75 E$68.76 E$68.77 E$68.78 E$68.79 E$68.80 E$68.81 E$68.82 E$68.83 E$68.84 E$68.85 E$68.86 E$68.87 E$68.88 E$68.89 E$68.90 E$68.91 E$68.92 E$68.93 E$68.94 E$68.95 E$68.96 E$68.97 E$68.98 E$68.99 E$68.100 E$69.1 E$69.2 E$69.3 E$69.4 E$69.5 E$69.6 E$69.7 E$69.8 E$69.9 E$69.10 E$69.11 E$69.12 E$69.13 E$69.14 E$69.15 E$69.16 E$69.17 E$69.18 E$69.19 E$69.20 E$69.21 E$69.22 E$69.23 E$69.24 E$69.25 E$69.26 E$69.27 E$69.28 E$69.29 E$69.30 E$69.31 E$69.32 E$70.1 E$70.2 E$70.3 E$70.4 E$70.5 E$70.6 E$70.7 E$70.8 E$70.9 E$70.10 E$70.11 E$70.12 E$70.13 E$70.14 E$70.15 E$70.16 E$70.17 E$70.18 E$70.19 E$70.20 E$70.21 E$70.22 E$70.23 E$70.24 E$70.25 E$70.26 E$70.27 E$70.28 E$70.29 E$70.30 E$70.31 E$70.32 E$71.P$1 E$71.P$2 E$71.P$3 E$71.P$4 E$71.P$5 E$71.P$6 E$71.P$7 E$71.P$8 E$71.P$9 E$71.P$10 E$71.P$11 E$71.P$12 E$71.P$13 E$71.P$14 E$71.P$15 E$71.P$16 E$71.P$17 E$71.P$18 E$71.P$19 E$71.P$20 E$71.P$21 E$71.P$22 E$71.P$23 E$71.P$24 E$71.P$25 E$71.P$26 E$71.P$27 E$71.P$28 E$71.P$29 E$71.P$30 E$71.P$31 E$71.P$32 E$71.P$33 E$71.P$34 E$71.P$35 E$71.P$36 E$71.P$37 E$71.P$38 E$71.P$39 E$71.P$40 E$71.P$41 E$71.P$42 E$71.P$43 E$71.P$44 E$71.P$45 E$71.P$46 E$71.P$47 E$71.P$48 E$71.P$49 E$71.P$50 E$71.P$51 E$71.P$52 E$71.P$53 E$71.P$54 E$71.P$55 E$71.P$56 E$71.P$57 E$71.P$58 E$71.P$59 E$71.P$60 E$71.P$61 E$71.P$62 E$71.P$63 E$71.P$64 E$71.P$65 E$71.P$66 E$71.P$67 E$71.P$68 E$71.P$69 E$71.P$70 E$71.P$71 E$71.P$72 E$71.P$73 E$71.P$74 E$71.P$75 E$71.P$76 E$71.P$77 E$71.P$78 E$71.P$79 E$71.P$80 E$71.P$81 E$71.P$82 E$71.P$83 E$71.P$84 E$71.P$85 E$71.P$86 E$71.P$87 E$71.P$88 E$71.P$89 E$71.P$90 E$71.P$91 E$71.P$92 E$71.P$93 E$71.P$94 E$71.P$95 E$71.P$96

## Keep-outs
Keep-Out Layer:
  lines w0: 0,0 6100,0 6100,1000 0,1000 0,0

## Other copper
Top:
  region: 4392.76,532.76 4392.76,627.24 4487.24,627.24 4487.24,532.76
  region: 60,260 60,300 430,300 430,260
  region: 60,325 60,355 430,355 430,325
  region: 60,387 60,411 430,411 430,387
  region: 60,451 60,469 430,469 430,451
  region: 60,514 60,526 430,526 430,514
  region: 60,575 60,585 430,585 430,575
  region: 60,636 60,644 430,644 430,636
  region: 60,697 60,703 430,703 430,697
Bottom:
  region: 167 vertices and 1 holes, not listed, extent 4787.52,279.43 4929.62,423
  region: 159 vertices and 1 holes, not listed, extent 4613.18,279.43 4753.82,488.92
  region: 4955.99,374.65 4955.99,282.36 4986.76,282.36 4986.76,488.92 4955.99,488.92 4955.99,376.12
  region: 321 vertices and 0 holes, not listed, extent 5427.72,282.36 5555.18,488.92
  region: 219 vertices and 0 holes, not listed, extent 5755.88,282.36 5971.23,423
  region: 161 vertices and 1 holes, not listed, extent 5590.34,279.43 5730.98,423
  region: 275 vertices and 1 holes, not listed, extent 5285.61,279.43 5421.86,423
  text "https://make.kaist.ac.kr" at 5971.23,150 h70

## Silkscreen, mask and mechanical layers (free items; w line width, h text height)
Top Overlay:
  drawing of 239 lines, arcs and shapes, not listed
  text "1/8" at 252.63,893.76 h62 r90
  text "6" at 5994.21,853.95 h122.05
  text "3" at 3075,850 h122.05
  text "4" at 4075,840 h122.05
  text "5" at 5075,840 h122.05
  text "AWG" at 5224,840 h93
  text "0" at 76.24,833.74 h122.05
  text "1" at 1075,830 h122.05
  text "2" at 2075,830 h122.05
  text "SOT89" at 2573,820 h62
  text "XTAL/OSC" at 3650,810 h77.5
  text "28" at 4320,780 h62 r90
  text "27" at 4380,780 h62 r90
  text "26" at 4440,780 h62 r90
  text "25" at 4500,780 h62 r90
  text "24" at 4560,780 h62 r90
  text "23" at 4620,780 h62 r90
  text "22" at 4680,780 h62 r90
  text "21" at 4740,780 h62 r90
  text "20" at 4802,780 h62 r90
  text "19" at 4864,780 h62 r90
  text "18" at 4937,780 h62 r90
  text "17" at 5010,780 h62 r90
  text "16" at 5038,780 h62
  text "15" at 5123,780 h62
  text "14" at 5215,780 h62
  text "13" at 5315,780 h62
  text "12" at 5423,780 h62
  text "11" at 5540,780 h62
  text "10" at 5667,780 h62
  text "9" at 5826,780 h62
  text "8" at 5979,780 h62
  text "Common Diodes" at 1320,776 h93
  text "Trace Width (mil)" at 60,730 h62
  text "6" at 470,680 h62
  text "and    Transistors" at 1320,680 h93
  text "E" at 5133.31,642.68 h62
  text "SOT23" at 2320,625 h62
  text "8" at 470,620 h62
  text "2.5X2" at 4080,620 h62
  text "B" at 4971.89,571.81 h62
  text "3.2X2.4" at 3867.99,566.45 h62
  text "10" at 470,560 h62
  text "Anode  Cathode" at 5573.46,560 h62
  text "QFN" at 4330,530 h62 r90
  text "12" at 470,500 h62
  text "SMB" at 1909,500 h62
  text "QFP" at 4790,500 h62 r90
  text "-" at 6038.03,497.01 h62
  text "PNP" at 4960.08,493.07 h62 r315
  text "+" at 5573.46,493.07 h62
  text "5X3.2" at 3650,490 h62
  text "2X1.2" at 3976.97,486.45 h62
  text "0201(0603)" at 765,460 h62 r90
  text "0402(1005)" at 825,460 h62 r90
  text "0603(1608)" at 885,460 h62 r90
  text "0805(2012)" at 945,460 h62 r90
  text "1206(3216)" at 1025,460 h62 r90
  text "1210(3225)" at 1130,460 h62 r90
  text "SOD128" at 1700,460 h62 r90
  text "2010(5025)" at 1256,458.45 h62 r90
  text "SMA" at 1755,450 h62
  text "SMC" at 2149.88,447.86 h62
  text "18" at 470,440 h62
  text "DPAK" at 2880,440 h62
  text "C" at 5133.31,434.02 h62
  text "SOD80" at 1565,430 h62 r90
  text "MiniMELF" at 1617,430 h62 r90
  text "+" at 5390,418.43 h62
  text "S" at 5449.06,418.43 h62
  text "+" at 5700,418.43 h62
  text "80" at 5910,396 h124
  text "D2PAK" at 3262,395 h62
  text "24" at 470,380 h62
  text "SOD323" at 1510,366 h62 r90
  text "SOT223" at 2555,360 h62
  text "C" at 5133.31,352.68 h62
  text "MicroMELF" at 1440,326 h62 r90
  text "30" at 470,320 h62
  text "60" at 5910,316 h93
  text "G" at 5252.2,300.31 h62
  text "G" at 5562.2,300.31 h62
  text "SC79" at 1380,298 h62 r90
  text "HC49" at 3880,290 h62
  text "B" at 4971.89,281.81 h62
  text "40" at 470,260 h62
  text "SMD R/C/L" at 640,260 h93 r90
  text "Imperial (Metric)" at 700,260 h62 r90
  text "SC70" at 2380,250 h62 r90
  text "50" at 5910,246 h77.5
  text "SSOP" at 4460,240 h62 r90
  text "PMOS" at 5254.51,233.39 h62 r337.5
  text "NMOS" at 5719.69,221.57 h62 r180
  text "NPN" at 4960.08,203.07 h62 r315
  text "SOIC" at 4790,200 h62 r90
  text "40mil" at 5910,185 h62
  text "S" at 5759.06,182.2 h62
  text "Font Size" at 5890,180 h62 r90
  text "E" at 5133.31,144.02 h62
  text "15" at 5975.15,90.04 h93
  text "0" at 78.74,78.74 h122.05
  text "1" at 472.44,78.74 h122.05
  text "2" at 866.14,78.74 h122.05
  text "3" at 1259.84,78.74 h122.05
  text "4" at 1653.54,78.74 h122.05
  text "5" at 2047.24,78.74 h122.05
  text "6" at 2440.94,78.74 h122.05
  text "7" at 2834.65,78.74 h122.05
  text "9" at 3622.05,78.74 h122.05
  text "10" at 4015.75,78.74 h122.05
  text "11" at 4409.45,78.74 h122.05
  text "12" at 4803.15,78.74 h122.05
  text "13" at 5196.85,78.74 h122.05
  text "14" at 5590.55,78.74 h122.05
  text "8" at 3228.35,58.74 h122.05
Bottom Overlay:
  drawing of 43 lines, arcs and shapes, not listed
  text "BGA 20X20" at 1565,861.77 h77.5
  text "BGA" at 870,800 h77.5
  text "QFP x32" at 3705,795 h77.5
  text "0.8mm Pitch" at 3705,720 h77.5
  text "QFP x100" at 3095,370 h62
  text "QFP x100" at 2415,325 h77.5
  text "0.4mm Pitch" at 3095,310 h62
  text "DDR3 RAM" at 785,290 h93 r270
  text "QFP x32" at 4110,265 h77.5
  text "0.5mm Pitch" at 2415,250 h77.5
  text "0.5mm Pitch" at 4110,190 h77.5
  text "0.8mm" at 930,155 h77.5
  text "0.8mm Pitch" at 1594.66,99.6 h77.5
  text "0.65mm Pitch" at 320,90 h93 r270
  text "TSOP-66" at 410,90 h93 r270
  text "Pitch" at 930,80 h77.5
Top Paste:
  region: 2406.54,337.72 2406.54,367.24 2422.28,367.24 2422.28,337.72
  region: 2457.72,337.72 2457.72,367.24 2473.46,367.24 2473.46,337.72
  region: 2407,274 2407,301 2420,301 2420,274
  region: 2433.5,274 2433.5,301 2446.5,301 2446.5,274
  region: 2460,274 2460,301 2473,301 2473,274
Top Solder:
  region: 4392.76,532.76 4392.76,627.24 4487.24,627.24 4487.24,532.76
  region: 60,257 60,303 430,303 430,257
  region: 60,322 60,358 430,358 430,322
  region: 60,384 60,414 430,414 430,384
  region: 60,448 60,472 430,472 430,448
  region: 60,511 60,529 430,529 430,511
  region: 60,570 60,590 430,590 430,570
  region: 60,631 60,649 430,649 430,631
  region: 60,692 60,708 430,708 430,692
Bottom Solder:
  drawing of 7 lines, arcs and shapes, not listed
  text "https://make.kaist.ac.kr" at 5971.23,150 h70
Dimension:
  the board outline again, w1
Top Assembly:
  lines w5.91: 802.13,236.06 802.13,243.94 ; 817.87,236.06 817.87,243.94